# Altium PCB HU_revC.PcbDoc (part 5 of 5)
Units mm, origin at the board's own origin, x right, y up, seen from the top; angles counter-clockwise.
Board outline 391 x 236 mm, 6 copper layers (Top Layer, Layer 1, Layer 2, Layer 3, Layer 4, Bottom Layer), stack 1.538 mm thick; 737 components, 574 nets, 2599 pads, 143 vias.
Unrouted connection lines stored in the file: 1682.
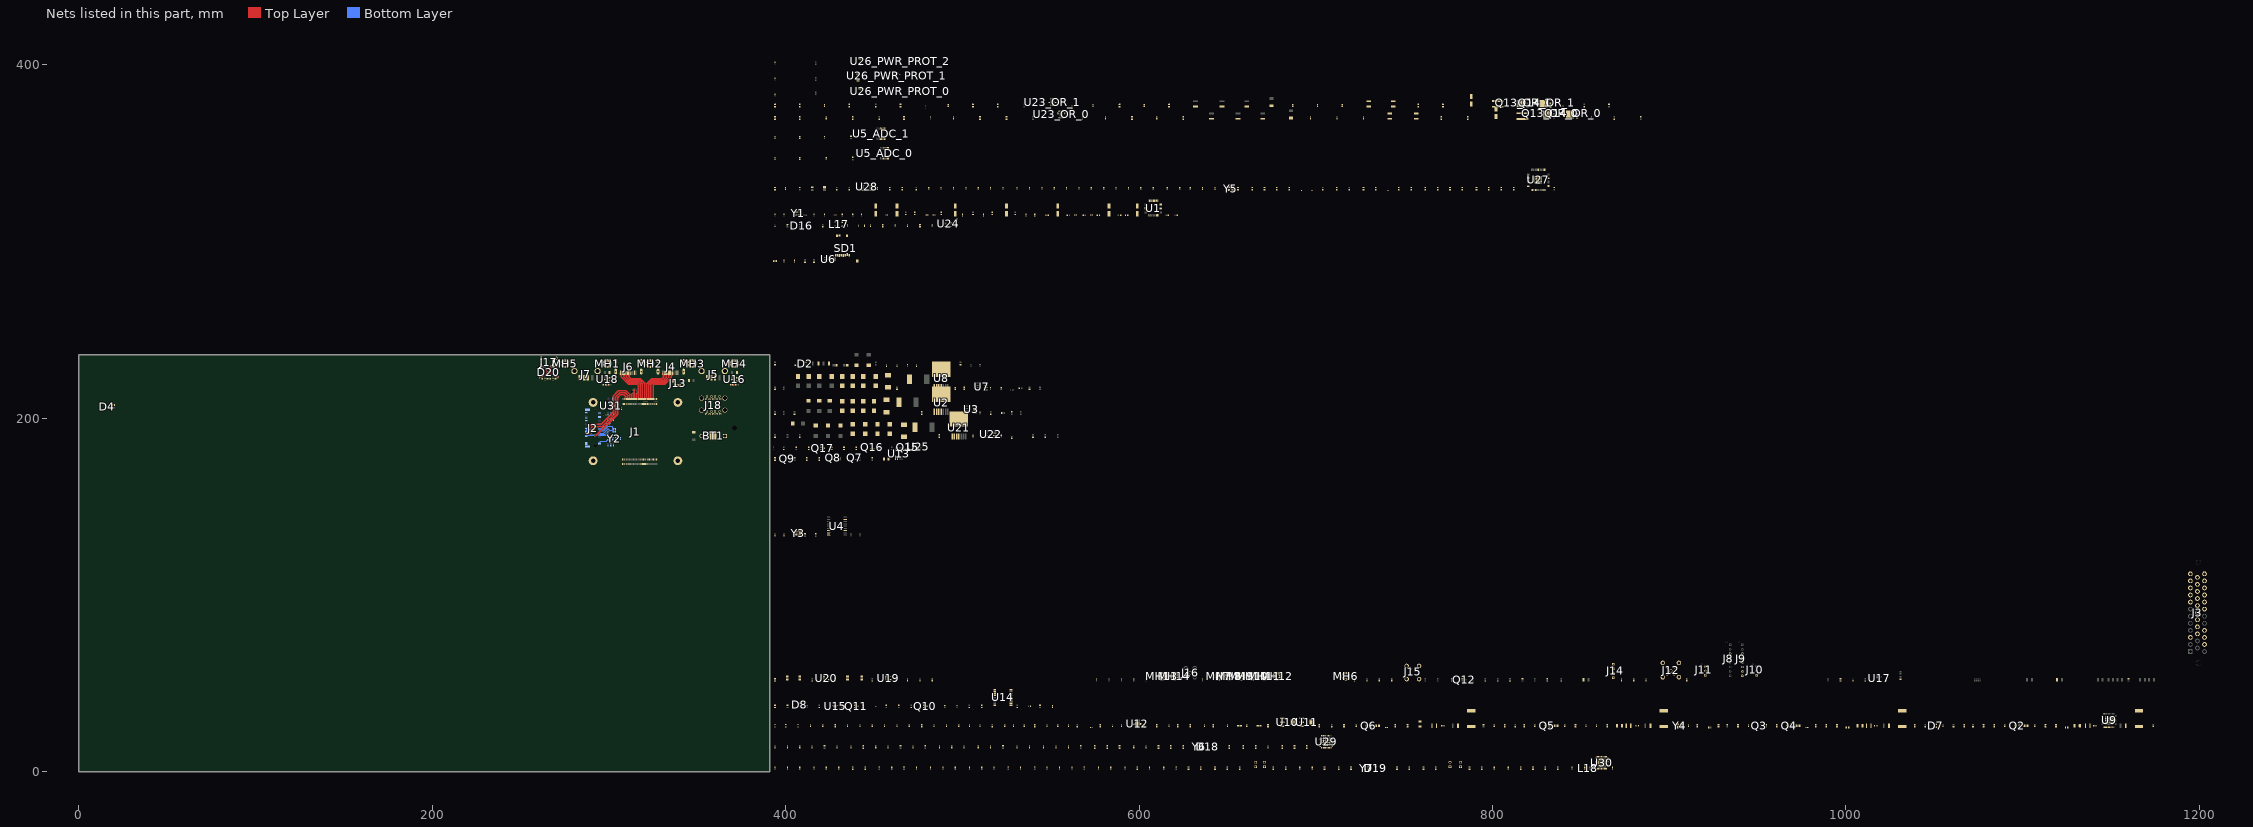
[diagram p4: the nets of this part, all layers, seen from the top]

## Via types
v1: diameter 0.5, hole 0.3, Top Layer to Bottom Layer, 143 vias

## Nets (pads, with @x,y where several pads share a name; then routed paths per layer and width w, separated by ;. In a path a pad name is that pad's centre, name@x,y a point inside that pad or via, vN(x,y) a via of type N, cw(c..) or ccw(c..) an arc to the next point about the centre after c; other vN are vias at no path point) (continued)
GND: BT1.3 C8.2 C9.2 C10.2 C11.2 C12.2 C13.2 C14.2 C15.2 C16.2 C17.2 C18.2 C19.1 C20.1 C21.2 C22.2 C23.2 C24.2 C25.2 C27.2 C28.2 C29.2 C30.2 C31.2 C32.2 C33.2 C36.2 C37.2 C38.2 C39.2 C40.2 C41.2 C42.2 C43.2 C44.2 C45.2 C46.2 C47.2 C48.2 C49.2 C50_ADC_0.2 C50_ADC_1.2 C51_ADC_0.2 C51_ADC_1.2 C52_ADC_0.2 C52_ADC_1.2 C53.2 C54.2 C55.2 C57.2 C58.2 C59.2 C60.2 C61.2 C62.2 C63.2 C64.2 C66.2 C68.1 C70.2 C72.1 C74.1 C75.1 C76.2 C78.1 C80.2 C82.1 C83.1 C84.2 C85.1 C86.2 C90.1 C91.1 C92.1 C93.1 C94.1 C95.1 C96.1 C97.1 C98.1 C99.1 C101.1 C102.1 C103.1 C104.1 C105.1 C106.1 C107.1 C108.1 C109.1 C110.1 C111.2 C112.2 C113.2 C114.2 C115.2 C116.2 C117.2 C118.2 C119.2 C120.2 C121.2 C122.2 C123.2 C124.2 C125.2 C126.2 C127.2 C128.2 C129.2 C130.2 C131.2 C132.2 C133.2 C134.2 C135.2 C136.2 C137.2 C138.2 C140.2 C141.2 C142.2 C143.2 C144.2 C145.2 C146.2 C147_OR_0.1 C147_OR_1.1 C148_OR_0.2 C148_OR_1.2 C149_OR_0.2 C149_OR_1.2 C152_OR_0.2 C152_OR_1.2 C153_OR_0.1 C153_OR_1.1 C154_OR_0.1 C154_OR_1.1 C155_OR_0.1 C155_OR_1.1 C156_OR_0.1 C156_OR_1.1 C158_OR_0.2 C158_OR_1.2 C159_OR_0.1 C159_OR_1.1 C160.2 C161.2 C162.2 C163.2 C164.2 C165.1 C166.1 C167.2 C168_PWR_PROT_0.2 C168_PWR_PROT_1.2 C168_PWR_PROT_2.2 C169.2 C170.2 C171.2 C172.2 C173.2 C174.2 C175.2 C176.2 C177.2 C178.2 C179.2 C180.2 C181.2 C182.2 C183.2 C184.2 C185.2 C186.2 C187.2 C188.2 C189.2 C190.2 C191.2 C192.2 C193.2 C194.2 C195.2 C196.2 C197.2 C198.2 C199.2 C200.2 C201.2 C202.2 C203.2 C204.2 C205.2 C206.2 C207.2 C208.2 C209.2 C210.2 C211.2 C212.2 C213.2 C214.2 C215.2 C216.2 C217.2 C218.2 C222.2 C223.2 C224.2 C225.2 C226.2 C227.2 C228.2 C229.2 C230.2 C231.2 C232.2 C233.2 C234.2 C235.2 C236.2 C237.2 C238.2 C239.2 C240.2 C241.2 C242.2 C243.2 C244.2 C245.2 C246.2 C247.2 C248.2 D3.2 D5.2 D6.2 D9.2 D10.2 D11_OR_0.2 D11_OR_1.2 D12_OR_0.1 D12_OR_1.1 D13_OR_0.2 D13_OR_1.2 D14_OR_0.2 D14_OR_1.2 D16.3 D17.2 D20.3 D20.8 J1.1 J1.2 J1.7 J1.8 J1.13 J1.14 J1.22 J1.23 J1.32 J1.33 J1.42 J1.43 J1.52 J1.53 J1.59 J1.60 J1.65 J1.66 J1.71 J1.74 J1.98 J1.107 J1.108 J1.113 J1.114 J1.119 J1.120 J1.125 J1.126 J1.131 J1.132 J1.137 J1.138 J1.144 J1.150 J1.155 J1.156 J1.161 J1.162 J1.167 J1.168 J1.173 J1.174 J1.179 J1.180 J1.185 J1.186 J1.191 J1.192 J1.197 J1.198 J1.201 J1.202 J1.203 J1.204 J2.1 J2.3 J2.9 J2.15 J2.21 J2.27 J2.33 J2.39 J2.45 J2.51 J2.57 J2.71 J2.73 J2.75 J2.76 J2.77 J3.3 J3.8 J3.9 J3.15 J3.16 J3.17 J3.18 J3.19 J3.20 J3.21 J3.22 J3.25 J3.26 J3.27 J3.30 J3.33 J4.2 J4.5 J4.8 J4.11 J4.17 J4.SH1 J4.SH2 J4.SH3 J4.SH4 J5.4 J5.5 J5.6 J6.2 J6.5 J6.8 J6.11 J6.17 J6.SH1 J6.SH2 J6.SH3 J6.SH4 J7.4 J7.5 J7.6 J8.3 J8.4 J9.3 J9.4 J10.2 J11.2 J13.3 J13.5 J13.6 J14.3 J17.A1_B12 J17.B1_A12 J17.SH1 J17.SH2 J17.SH3 J17.SH4 J18.4 J18.7 J18.13 J18.16 J18.19 J18.20 J18.21 J18.22 MH1.1 MH2.1 MH3.1 MH4.1 MH5.1 MH6.1 MH7.1 MH8.1 MH9.1 MH10.1 MH11.1 MH12.1 MH13.1 MH14.1 MP1.1 Q2.5 Q4.5 Q5.5 Q6.5 Q9.2 Q11.2 Q12.2 Q17.2 R4.1 R7.1 R11.1 R14.1 R18.1 R22.2 R25.1 R26.1 R27.2 R28.1 R30.1 R35.1 R36.1 R40.1 R47.2 R51.1 R61.1 R64.1 R69.1 R74.1 R75.1 R77.1 R80.1 R81.1 R86.1 R88.1 R90.1 R92.1 R96.1 R98.1 R103.1 R105.1 R106.1 R117.2 R123.1 R130.2 R133.2 R139.1 R145.1 R149.1 R151.1 R158.1 R161.2 R169.2 R170.2 R176.1 R178.1 R181.1 R186.1 R188_OR_0.1 R188_OR_1.1 R196_OR_0.1 R196_OR_1.1 R197_OR_0.1 R197_OR_1.1 R198_OR_0.1 R198_OR_1.1 R199_OR_0.1 R199_OR_1.1 R201_OR_0.1 R201_OR_1.1 R210.1 R212.1 R218.2 R227.2 R229.2 R230.2 R231.2 R232.2 R233.2 R236.1 R237.2 R241.1 R246.1 R247.1 R248.1 R249.1 R251.1 R253.1 R254.1 R259.2 R265.2 R266.2 R269.1 R270.1 R277.1 R278.1 R279.1 R283.2 R289.2 R290.2 SD1.6 SD1.10 SD1.11 SD1.12 SD1.13 SW1.1 U1.4 U1.6 U1.7 U1.13 U1.22 U1.30 U1.42 U2.4 U2.8 U3.5 U4.9 U5_ADC_0.3 U5_ADC_0.12 U5_ADC_1.3 U5_ADC_1.12 U6.2 U7.5 U8.4 U8.8 U9.57 U10.1 U11.1 U12.3 U12.17 U13.5 U14.1 U14.10 U14.12 U15.5 U15.7 U16.2 U17.3 U18.2 U19.2 U20.2 U21.4 U21.8 U22.5 U23_OR_0.13 U23_OR_1.13 U24.2 U25.5 U26_PWR_PROT_0.5 U26_PWR_PROT_1.5 U26_PWR_PROT_2.5 U27.EPAD U28.4 U29.49 U30.49 U31.2 Y1.2 Y1.4 Y2.2 Y3.2 Y3.4 Y4.2 Y4.4 Y5.2 Y5.4 Y6.2 Y6.4 Y7.2 Y7.4
  other v1: 859.801,2.8 860.901,2.8 862.001,2.8 863.101,2.8 864.201,2.8 859.801,3.9 860.901,3.9 862.001,3.9 863.101,3.9 864.201,3.9 859.801,5 860.901,5 862.001,5 863.101,5 864.201,5 859.801,6.1 860.901,6.1 862.001,6.1 863.101,6.1 864.201,6.1 859.801,7.2 860.901,7.2 862.001,7.2 863.101,7.2 864.201,7.2 703.801,14.8 704.901,14.8 706.001,14.8 707.101,14.8 708.201,14.8 703.801,15.9 704.901,15.9 706.001,15.9 707.101,15.9 708.201,15.9 703.801,17 704.901,17 706.001,17 707.101,17 708.201,17 703.801,18.1 704.901,18.1 706.001,18.1 707.101,18.1 708.201,18.1 703.801,19.2 704.901,19.2 706.001,19.2 707.101,19.2 708.201,19.2 1147.351,27.35 1148.451,27.35 1149.551,27.35 1150.651,27.35 1147.351,28.45 1148.451,28.45 1149.551,28.45 1150.651,28.45 1147.351,29.55 1148.451,29.55 1149.551,29.55 1150.651,29.55 1147.351,30.65 1148.451,30.65 1149.551,30.65 1150.651,30.65 291.25,189.75 289.25,191.25 291.25,191.25 289.25,192.75 291.25,192.75 291.25,194.25 297,202 298.25,202 316,209.5 317.25,209.5 318.5,209.5 319.75,209.5 321,209.5 322.25,209.5 323.5,209.5 324.75,209.5 326,209.5 327.25,209.5 312.725,215.25 313.475,215.25 315.125,215.25 315.875,215.25 313.425,216 315.175,216 263.75,221.5 268.25,221.5 264,226 266,226 268,226 824.501,333.5 825.501,333.5 826.501,333.5 827.501,333.5 824.501,334.5 825.501,334.5 826.501,334.5 827.501,334.5 824.501,335.5 825.501,335.5 826.501,335.5 827.501,335.5 824.501,336.5 825.501,336.5 826.501,336.5 827.501,336.5
GPS_TIMEPULSE: R136.1 U14.4
HDMI0_CK_N: J1.190 J4.12 | length 22.8
  Top Layer w0.123: J1.190@325.3,210.82 325.262,210.858 325.262,211.401 325.262,218.762 325.75,219.25 331.75,219.25 335.662,223.162 335.662,224.19 335.8,224.328 335.8,224.339 336,224.539 J4.12@336,225.69
HDMI0_CK_P: J1.188 J4.10 | length 22.8
  Top Layer w0.123: J1.188@324.9,210.82 324.938,210.858 324.938,218.896 325.616,219.573 331.616,219.573 335.338,223.296 335.338,224.19 335.2,224.328 335.2,224.339 335,224.539 J4.10@335,225.69
HDMI0_D0_N: J1.184 J4.9 | length 22.7
  Top Layer w0.123: J1.184@324.1,210.82 324.062,210.858 324.062,211.401 324.062,219.062 325.25,220.25 331.25,220.25 334.162,223.162 334.162,224.19 334.3,224.328 334.3,224.339 334.5,224.539 J4.9@334.5,225.69
HDMI0_D0_P: J1.182 J4.7 | length 22.7
  Top Layer w0.123: J1.182@323.7,210.82 323.738,210.858 323.738,219.196 325.116,220.573 331.116,220.573 333.838,223.296 333.838,224.19 333.7,224.328 333.7,224.339 333.5,224.539 J4.7@333.5,225.69
HDMI0_D1_N: J1.178 J4.6 | length 22.6
  Top Layer w0.123: J1.178@322.9,210.82 322.862,210.858 322.862,211.401 322.862,219.362 324.75,221.25 330.75,221.25 332.662,223.162 332.662,224.19 332.8,224.328 332.8,224.339 333,224.539 J4.6@333,225.69
HDMI0_D1_P: J1.176 J4.4 | length 22.6
  Top Layer w0.123: J1.176@322.5,210.82 322.538,210.858 322.538,219.496 324.616,221.573 330.616,221.573 332.338,223.296 332.338,224.19 332.2,224.328 332.2,224.339 332,224.539 J4.4@332,225.69
HDMI0_D2_N: J1.172 J4.3 | length 22.5
  Top Layer w0.123: J1.172@321.7,210.82 321.662,210.858 321.662,211.401 321.662,219.662 324.25,222.25 330.25,222.25 331.162,223.162 331.162,224.19 331.3,224.328 331.3,224.339 331.5,224.539 J4.3@331.5,225.69
HDMI0_D2_P: J1.170 J4.1 | length 22.5
  Top Layer w0.123: J1.170@321.3,210.82 321.338,210.858 321.338,219.796 324.116,222.573 330.116,222.573 330.838,223.296 330.838,224.19 330.7,224.328 330.7,224.339 330.5,224.539 J4.1@330.5,225.69
HDMI1_CK_N: J1.166 J6.12 | length 21.7
  Top Layer w0.123: J6.12@312,225.69 312,224.539 311.8,224.339 311.8,224.328 311.662,224.19 311.662,223.338 312.427,222.573 317.634,222.573 320.462,219.746 320.462,211.401 320.462,210.858 J1.166@320.5,210.82
HDMI1_CK_P: J1.164 J6.10 | length 21.7
  Top Layer w0.123: J6.10@311,225.69 311,224.539 311.2,224.339 311.2,224.328 311.338,224.19 311.338,223.204 312.293,222.25 317.5,222.25 320.138,219.612 320.138,210.858 J1.164@320.1,210.82
HDMI1_D0_N: J1.160 J6.9 | length 21.8
  Top Layer w0.123: J6.9@310.5,225.69 310.5,224.539 310.3,224.339 310.3,224.328 310.162,224.19 310.162,223.338 311.927,221.573 317.134,221.573 319.262,219.446 319.262,211.401 319.262,210.858 J1.160@319.3,210.82
HDMI1_D0_P: J1.158 J6.7 | length 21.8
  Top Layer w0.123: J6.7@309.5,225.69 309.5,224.539 309.7,224.339 309.7,224.328 309.838,224.19 309.838,223.204 311.793,221.25 317,221.25 318.938,219.312 318.938,210.858 J1.158@318.9,210.82
HDMI1_D1_N: J1.154 J6.6 | length 22
  Top Layer w0.123: J6.6@309,225.69 309,224.539 308.8,224.339 308.8,224.328 308.662,224.19 308.662,223.338 311.427,220.573 316.634,220.573 318.062,219.146 318.062,211.401 318.062,210.858 J1.154@318.1,210.82
HDMI1_D1_P: J1.152 J6.4 | length 22
  Top Layer w0.123: J6.4@308,225.69 308,224.539 308.2,224.339 308.2,224.328 308.338,224.19 308.338,223.204 311.293,220.25 316.5,220.25 317.738,219.012 317.738,210.858 J1.152@317.7,210.82
HDMI1_D2_N: J1.148 J6.3 | length 22.1
  Top Layer w0.123: J6.3@307.5,225.69 307.5,224.539 307.3,224.339 307.3,224.328 307.162,224.19 307.162,223.338 310.927,219.573 316.134,219.573 316.862,218.846 316.862,213.102 316.862,210.858 J1.148@316.9,210.82
HDMI1_D2_P: J1.146 J6.1 | length 22.1
  Top Layer w0.123: J6.1@306.5,225.69 306.5,224.539 306.7,224.339 306.7,224.328 306.838,224.19 306.838,223.204 310.793,219.25 316,219.25 316.538,218.712 316.538,212.968 316.538,211.401 316.538,210.858 J1.146@316.5,210.82
HV_CPU_FAN_PWM: J1.19 R152.2 R154.2
HV_PWR_EN: R209.1 U23_OR_0.7 U23_OR_1.7 U24.7
INT_VCC: F6.1 F18_PWR_PROT_0.1 F18_PWR_PROT_1.1 F18_PWR_PROT_2.1 R211.2 U25.3 U25.4
LAN8830_ALLPHYAD: R243.2 U29.13
LAN8830_CLK125_EN: R254.2 U29.34 U30.24
LAN8830_MODE0: R246.2 U29.33 U30.25
LAN8830_MODE1: R247.2 U29.32 U30.26
LAN8830_MODE2: R248.2 U29.30 U30.27
LAN8830_MODE3: R249.2 U29.29 U30.28
LAN8830_MODE4: R245.2 U29.36 U30.23
LAN8830_PHYAD0: R251.2 R252.2 U29.18
LAN8830_PHYAD1: R244.2 R250.2 U29.16
LAN8830_PHYAD2: R253.2 U29.15
LAN8830_RESET_N: C197.1 R242.2 U29.43
LAN8830_X25_N: C199.1 U29.45 Y6.3
LAN8830_X25_P: C198.1 U29.46 Y6.1
LAN8870_LINK_LED: R273.2 U30.38
LAN8870_MODE_STRP: J20.1 R276.1 U30.18
LAN8870_RESET_N: C222.1 R263.2 R275.2 U30.39
LAN8870_RXCTL: R268.2 U29.26 U30.17
LAN8870_RXD0: J22.1 R274.1 U29.19 U30.11
LAN8870_RXD1: J21.1 R272.1 U29.20 U30.12
LAN8870_RXD2: R271.1 U29.21 U30.14
LAN8870_RXD3: R277.2 U29.22 U30.15
LAN8870_SPEED_SEL: J19.1 R267.1 U30.32
LAN8870_VBAT: C242.1 C243.1 R280.1 R287.2 U30.1
LAN8870_VDDA: C237.1 C238.1 C239.1 C240.1 C241.1 R281.1 R286.2 U30.37 U30.41 U30.45 U30.48
LAN8870_VDDIO: C244.1 C245.1 C246.1 C247.1 R263.1 R267.2 R268.1 R271.2 R272.2 R274.2 R276.2 R288.2 U30.13 U30.20 U30.36
LAN8870_X25_N: C224.1 U30.7 Y7.3
LAN8870_X25_P: C223.1 U30.6 Y7.1
LL_FR_L: C1.1 J10.1 R4.2
LL_FR_R: C2.1 J10.3 R7.2
LL_RR_L: C3.1 J11.1 R11.2
LL_RR_R: C4.1 J11.3 R14.2
LM74910H_ISCP_OR_0: C157_OR_0.1 R190_OR_0.1 U23_OR_0.18
LM74910H_ISCP_OR_1: C157_OR_1.1 R190_OR_1.1 U23_OR_1.18
LM74910H_VS_OR_0: C151_OR_0.1 C152_OR_0.1 Q13_OR_0.5-6-7-8 R187_OR_0.2 R189_OR_0.1 R190_OR_0.2 R191_OR_0.2 R193_OR_0.2 U23_OR_0.22 U23_OR_0.24
LM74910H_VS_OR_1: C151_OR_1.1 C152_OR_1.1 Q13_OR_1.5-6-7-8 R187_OR_1.2 R189_OR_1.1 R190_OR_1.2 R191_OR_1.2 R193_OR_1.2 U23_OR_1.22 U23_OR_1.24
LNA_EN: R132.1 U14.13
M2_3V3: C36.1 C37.1 C38.1 C39.1 C40.1 C41.1 C42.1 C43.1 C44.1 C45.1 D4.2 D4.3 J2.2 J2.4 J2.12 J2.14 J2.16 J2.18 J2.70 J2.72 J2.74 R45.1 R46.1 U31.1 Y2.1 Y2.4
MATENET_GND: C124.1 C125.1 C126.1 C127.1 C221.1 J15.3 R264.2
MAX96724_1V2: C86.1 C98.2 C99.2 C101.2 C102.2 C109.2 C110.2 C111.1 R106.2 U9.30 U9.55 U9.56 U11.2 U11.4
MAX96724_1V8: C84.1 C103.2 C104.2 C105.2 C106.2 C112.1 U9.7 U9.21 U10.2 U10.4
MAX96724_3V3: C83.2 C85.2 C107.2 C108.2 C113.1 F12.1 R71.2 R83.2 R99.2 U9.24 U10.3 U11.3
MAX96724_CFG0: R71.1 R74.2 U9.4
MAX96724_CFG1: R83.1 R88.2 U9.25
MAX96724_PoC_A: C65.2 J12.2 L5.2
MAX96724_PoC_A_V_N: L3.1 R70.1 R108.1
MAX96724_PoC_A_V_P: C68.2 Q2.4 R70.2 R107.1
MAX96724_PoC_B: C69.2 J12.1 L8.2
MAX96724_PoC_B_V_N: L6.1 R82.1 R110.1
MAX96724_PoC_B_V_P: C72.2 Q4.4 R82.2 R109.1
MAX96724_PoC_C: C73.2 J12.4 L11.2
MAX96724_PoC_C_V_N: L9.1 R93.1 R112.1
MAX96724_PoC_C_V_P: C78.2 Q5.4 R93.2 R111.1
MAX96724_PoC_D: C79.2 J12.3 L14.2
MAX96724_PoC_D_V_N: L12.1 R100.1 R116.1
MAX96724_PoC_D_V_P: C82.2 Q6.4 R100.2 R114.1
MAX96724_SIOA_N: C67.1 U9.22
MAX96724_SIOA_P: C65.1 U9.23
MAX96724_SIOB_N: C71.1 U9.19
MAX96724_SIOB_P: C69.1 U9.18
MAX96724_SIOC_N: C77.1 U9.9
MAX96724_SIOC_P: C73.1 U9.10
MAX96724_SIOD_N: C81.1 U9.6
MAX96724_SIOD_P: C79.1 U9.5
MAX96724_X_N: C75.2 U9.16 Y4.3
MAX96724_X_P: C74.2 U9.15 Y4.1
MCP2515_X_N: C49.1 U4.7 Y3.3
MCP2515_X_P: C48.1 U4.8 Y3.1
MIC_N: J3.32
MIC_P: C6.2 C7.2 J3.31 R20.1
MINIFAKRA_GND: C120.1 C121.1 C122.1 C123.1 J12.MH1 J12.MH2 J12.MH3 J12.MH4 J12.MH5
NetBT1_1: BT1.1 BT1.2 D1.2
NetC1_2: C1.2 U1.35
NetC2_2: C2.2 U1.36
NetC5_2: C5.2 R16.2 R17.2
NetC6_1: C6.1 U1.23
NetC7_1: C7.1 U1.24
NetC8_1: C8.1 R19.1 R20.2
NetC10_1: C10.1 U1.28
NetC26_1: C26.1 U2.3
NetC26_2: C26.2 D3.1 L1.1 U2.1
NetC27_1: C27.1 C28.1 C29.1 C30.1 U2.2 U26_PWR_PROT_1.3 U26_PWR_PROT_1.4
NetC51_ADC_0_1: C51_ADC_0.1 C52_ADC_0.1 R58_ADC_0.2 U5_ADC_0.13
NetC51_ADC_1_1: C51_ADC_1.1 C52_ADC_1.1 R58_ADC_1.2 U5_ADC_1.13
NetC53_1: C53.1 C54.1 SD1.4 U6.1
NetC56_1: C56.1 U8.3
NetC56_2: C56.2 D6.1 L2.1 U8.1
NetC57_1: C57.1 C58.1 C59.1 C60.1 R65.1 U8.2 U26_PWR_PROT_2.3 U26_PWR_PROT_2.4
NetC66_1: C66.1 L3.2 L4.1 R73.2
NetC67_2: C67.2 R75.2
NetC70_1: C70.1 L6.2 L7.1 R85.2
NetC71_2: C71.2 R90.2
NetC76_1: C76.1 L9.2 L10.1 R95.2
NetC77_2: C77.2 R96.2
NetC80_1: C80.1 L12.2 L13.1 R102.2
NetC81_2: C81.2 R103.2
NetC87_1: C87.1 R108.2 U12.12
NetC87_2: C87.2 R107.2 U12.11
NetC88_1: C88.1 R110.2 U12.14
NetC88_2: C88.2 R109.2 U12.13
NetC89_1: C89.1 R112.2 U12.7
NetC89_2: C89.2 R111.2 U12.8
NetC92_2: C92.2 C93.2 C94.2 U9.8
NetC95_2: C95.2 C96.2 C97.2 U9.20
NetC100_1: C100.1 R116.2 U12.9
NetC100_2: C100.2 R114.2 U12.10
NetC139_1: C139.1 U21.3
NetC139_2: C139.2 D10.1 L16.1 U21.1
NetC140_1: C140.1 C141.1 C142.1 C143.1 R182.1 U21.2 U26_PWR_PROT_0.3 U26_PWR_PROT_0.4
NetC150_OR_0_1: C150_OR_0.1 R191_OR_0.1 U23_OR_0.20
NetC150_OR_0_2: C150_OR_0.2 C157_OR_0.2 Q14_OR_0.5-6-7-8 R189_OR_0.2 U23_OR_0.19
NetC150_OR_1_1: C150_OR_1.1 R191_OR_1.1 U23_OR_1.20
NetC150_OR_1_2: C150_OR_1.2 C157_OR_1.2 Q14_OR_1.5-6-7-8 R189_OR_1.2 U23_OR_1.19
NetC151_OR_0_2: C151_OR_0.2 U23_OR_0.23
NetC151_OR_1_2: C151_OR_1.2 U23_OR_1.23
NetC156_OR_0_2: C156_OR_0.2 R192_OR_0.1
NetC156_OR_1_2: C156_OR_1.2 R192_OR_1.1
NetC158_OR_0_1: C158_OR_0.1 R195_OR_0.1 R196_OR_0.2 U23_OR_0.4
NetC158_OR_1_1: C158_OR_1.1 R195_OR_1.1 R196_OR_1.2 U23_OR_1.4
NetC159_OR_0_2: C159_OR_0.2 R197_OR_0.2 U23_OR_0.9
NetC159_OR_1_2: C159_OR_1.2 R197_OR_1.2 U23_OR_1.9
NetC162_1: C162.1 D15.1 R202.2 U24.10
NetC163_1: C163.1 R202.1 R203.2 SW1.2
NetC165_2: C165.2 R204.1 R205.2
NetC196_1: C196.1 U28.6
NetC206_1: C206.1 C207.1 C208.1 C209.1 C210.1 R256.2 U29.23 U29.27 U29.31 U29.40
NetC211_1: C211.1 C212.1 R257.2 U29.47
NetC213_1: C213.1 C214.1 C215.1 R258.2 U29.1 U29.12
NetC216_1: C216.1 C217.1 C218.1 R260.2 U29.4 U29.9
NetC221_2: C221.2 R261.1 R262.1 R264.1
NetC225_1: C225.1 C226.1 R281.2 U30.9
NetC227_1: C227.1 C228.1 C229.1 C230.1 R282.2 U30.10 U30.19 U30.29
NetC231_1: C231.1 C232.1 C233.1 C234.1 R284.2 U30.5 U30.44 U30.46
NetC235_1: C235.1 C236.1 R285.2 U30.22
NetD2_1: D2.1 R31.1
NetD2_4: D2.4 R32.1
NetD4_1: D4.1 R47.1
NetD4_4: D4.4 R49.1
NetD7_1: D7.1 R80.2
NetD7_2: D7.2 Q3.3
NetD7_3: D7.3 Q3.6
NetD7_4: D7.4 R81.2
NetD8_1: D8.1 R135.2
NetD8_4: D8.4 R136.2
NetD13_OR_0_1: D13_OR_0.1 R137.2 R193_OR_0.1 U23_OR_0.6
NetD13_OR_1_1: D13_OR_1.1 R193_OR_1.1 U23_OR_1.6
NetD18_1: D18.1 R250.1
NetD18_4: D18.4 R252.1
NetD19_1: D19.1 R273.1
NetD19_4: D19.4 R275.1
NetF1_2: F1.2 R48.2 U31.5 | length 2
  Bottom Layer w0.3: U31.5@301.95,208.375 302.075,208.5 R48.2@303.85,208.5
NetF2_2: F2.2 Q2.2 R72.2
NetF3_2: F3.2 Q4.2 R84.2
NetF4_2: F4.2 Q5.2 R94.2
NetF5_2: F5.2 Q6.2 R101.2
NetF6_2: F6.2 Q7.1 Q7.2 Q7.3 Q8.1 Q8.2 Q8.3 R120.2
NetF13_2: F13.2 U16.5
NetF15_2: F15.2 U18.5
NetF16_1: F16.1 J13.1
NetF17_1: F17.1 J14.1
NetF18_PWR_PROT_0_2: F18_PWR_PROT_0.2 U26_PWR_PROT_0.1 U26_PWR_PROT_0.2
NetF18_PWR_PROT_1_2: F18_PWR_PROT_1.2 U26_PWR_PROT_1.1 U26_PWR_PROT_1.2
NetF18_PWR_PROT_2_2: F18_PWR_PROT_2.2 U26_PWR_PROT_2.1 U26_PWR_PROT_2.2
NetJ1_78: J1.78 R24.1
NetJ2_68: J2.68 R44.2 | length 5.2
  Bottom Layer w0.3: J2.68@294.65,187 298.575,187 299.425,187.85 R44.2@299.5,187.85
NetJ13_2: J13.2 R152.1
NetJ13_4: J13.4 R156.1
NetJ14_2: J14.2 R153.1
NetJ14_4: J14.4 R157.1
NetJ16_1: J16.1 L15.2 R124.2
NetJ18_5: J18.5 R174.2
NetJ18_6: J18.6 R173.2
NetJ18_8: J18.8 R172.2
NetJ18_9: J18.9 R171.2
NetJ19_2: J19.2 R269.2
NetJ20_2: J20.2 R270.2
NetJ21_2: J21.2 R278.2
NetJ22_2: J22.2 R279.2
NetL4_2: L4.2 L5.1 R73.1
NetL7_2: L7.2 L8.1 R85.1
NetL10_2: L10.2 L11.1 R95.1
NetL13_2: L13.2 L14.1 R102.1
NetQ2_1: Q2.1 R76.1 R77.2
NetQ2_3: Q2.3 Q2.6 R72.1
NetQ3_2: Q3.2 R87.2 R89.2
NetQ3_5: Q3.5 R78.1 R79.1
NetQ4_1: Q4.1 R91.1 R92.2
NetQ4_3: Q4.3 Q4.6 R84.1
NetQ5_1: Q5.1 R97.1 R98.2
NetQ5_3: Q5.3 Q5.6 R94.1
NetQ6_1: Q6.1 R104.1 R105.2
NetQ6_3: Q6.3 Q6.6 R101.1
NetQ7_5-6-7-8: Q7.5-6-7-8 Q8.5-6-7-8 U13.1 U13.2
NetQ9_1: Q9.1 R122.2 R123.2
NetQ9_3: Q9.3 R121.1
NetQ10_1: Q10.1 R126.1 R127.1
NetQ10_3: Q10.3 R128.1 R129.1
NetQ11_1: Q11.1 R132.2 R133.1
NetQ12_1: Q12.1 R159.2 R161.1
NetQ13_OR_0_4: Q13_OR_0.4 U23_OR_0.1
NetQ13_OR_1_4: Q13_OR_1.4 U23_OR_1.1
NetQ14_OR_0_4: Q14_OR_0.4 R192_OR_0.2 U23_OR_0.14
NetQ14_OR_1_4: Q14_OR_1.4 R192_OR_1.2 U23_OR_1.14
NetQ15_5-6-7-8: Q15.5-6-7-8 Q16.5-6-7-8 U25.1 U25.2
NetQ17_1: Q17.1 R209.2 R210.2
NetQ17_3: Q17.3 R208.1
NetR5_1: R5.1 U1.43
NetR6_1: R6.1 U1.38
NetR8_1: R8.1 U1.39
NetR9_1: R9.1 U1.44
NetR10_1: R10.1 U1.33
NetR12_1: R12.1 U1.46
NetR13_1: R13.1 U1.34
NetR15_1: R15.1 U1.47
NetR16_1: R16.1 U1.40
NetR17_1: R17.1 U1.41
NetR34_2: R34.2
NetR37_1: R37.1
NetR37_2: R37.2 U3.7
NetR38_1: R38.1 U3.6
NetR48_1: R48.1 R50.1 R51.2 U31.4 | length 8.6
  Bottom Layer w0.3: U31.4@300.05,208.375 300.05,208.15 301.2,207 R51.2@303.85,207 303.85,207.075 304.9,208.125 304.9,208.25 R48.1@305.15,208.5 305.15,208.575 304.1,209.625 304.1,209.75 R50.1@303.85,210
NetR56_2: R56.2 R148.1 U4.17
NetR57_2: R57.2 R146.1 U4.12
NetR59_1: R59.1 R60.1 R61.2 U6.4
NetR63_1: R63.1 R65.2
NetR66_1: R66.1
NetR66_2: R66.2 U7.7
NetR67_1: R67.1 U7.6
NetR86_2: R86.2 U9.17
NetR113_1: R113.1 U12.16
NetR115_1: R115.1 U12.1
NetR117_1: R117.1 U12.6
NetR118_2: R118.2 U13.7
NetR125_2: R125.2 U14.9
NetR131_2: R131.2 TP4.1 U14.18
NetR134_1: R134.1 U15.4
NetR138_1: R138.1 R139.2 U16.4 | length 4.1
  Top Layer w0.3: R139.2@370.15,219 R138.1@371.85,219 371.85,220.75 372.15,221.05 U16.4@372.375,221.05
NetR147_1: R147.1 R149.2 U17.1
NetR150_1: R150.1 R151.2 U18.4 | length 4.1
  Top Layer w0.3: R151.2@298.15,219 R150.1@299.85,219 299.85,220.75 300.15,221.05 U18.4@300.375,221.05
NetR163_2: R163.2 U14.2
NetR164_2: R164.2 U14.3
NetR175_1: R175.1 R176.2 U19.4
NetR177_1: R177.1 R178.2 U20.4
NetR180_1: R180.1 R182.2
NetR183_1: R183.1
NetR183_2: R183.2 U22.7
NetR184_1: R184.1 U22.6
NetR195_OR_0_2: R195_OR_0.2 R200_OR_0.2 U23_OR_0.3
NetR195_OR_1_2: R195_OR_1.2 R200_OR_1.2 U23_OR_1.3
NetR199_OR_0_2: R199_OR_0.2 U23_OR_0.11
NetR199_OR_1_2: R199_OR_1.2 U23_OR_1.11
NetR200_OR_0_1: R200_OR_0.1 R201_OR_0.2 U23_OR_0.5
NetR200_OR_1_1: R200_OR_1.1 R201_OR_1.2 U23_OR_1.5
NetR203_1: R203.1 U24.9
NetR214_2: R214.2 R218.1 U27.16
NetR215_2: R215.2 U27.33
NetR216_2: R216.2 U27.34
NetR217_2: R217.2 U27.21
NetR219_2: R219.2 U27.22
NetR220_2: R220.2 U27.41
NetR221_2: R221.2 U27.42
NetR222_2: R222.2 U27.49
NetR223_2: R223.2 U27.50
NetR224_2: R224.2 U27.56
NetR225_2: R225.2 U27.57
NetR226_1: R226.1 U27.8
NetR227_1: R227.1 U27.9
NetR228_1: R228.1 U27.10
NetR229_1: R229.1 U27.13
NetR230_1: R230.1 U27.64
NetR231_1: R231.1 U27.1
NetR232_1: R232.1 U27.3
NetR233_1: R233.1 U27.4
NetR235_1: R235.1 R236.2 U27.7
NetR237_1: R237.1 U27.32
NetR239_1: R239.1 R241.2 U28.7
NetR240_2: R240.2 U28.3
NetR259_1: R259.1 U29.48
NetR265_1: R265.1 U30.4
NetR266_1: R266.1 U30.8
NetR280_2: R280.2 R283.1 U30.3
NetR289_1: R289.1 U30.47
NetR290_1: R290.1 U30.21
NetSD1_9: SD1.9
NetTP5_1: TP5.1 U27.17
NetTP6_1: TP6.1 U27.5
NetTP7_1: TP7.1 U27.6
NetU5_ADC_0_4: U5_ADC_0.4
NetU5_ADC_0_5: U5_ADC_0.5
NetU5_ADC_0_6: U5_ADC_0.6
NetU5_ADC_0_7: U5_ADC_0.7
NetU5_ADC_0_8: U5_ADC_0.8
NetU5_ADC_0_9: U5_ADC_0.9
NetU5_ADC_0_10: U5_ADC_0.10
NetU5_ADC_0_11: U5_ADC_0.11
NetU5_ADC_1_4: U5_ADC_1.4
NetU5_ADC_1_5: U5_ADC_1.5
NetU5_ADC_1_6: U5_ADC_1.6
NetU5_ADC_1_7: U5_ADC_1.7
NetU5_ADC_1_8: U5_ADC_1.8
NetU5_ADC_1_9: U5_ADC_1.9
NetU5_ADC_1_10: U5_ADC_1.10
NetU5_ADC_1_11: U5_ADC_1.11
NetU29_25: U29.25 U30.16
nPCIE_CLKREQ: J2.52 R42.1 | length 5.5
  Bottom Layer w0.3: J2.52@294.65,191 298,191 R42.1@299.5,192.5
nPCIE_RST: J2.50 R41.1 R46.2 | length 9.4
  Bottom Layer w0.3: J2.50@294.65,191.5 297,191.5 R41.1@299.5,194 300.25,193.25 301.675,193.25 302.35,192.575 R46.2@302.35,192.5
nPCIE_WAKE: J2.54 R43.1 | length 5.1
  Bottom Layer w0.3: J2.54@294.65,190.5 299,190.5 R43.1@299.5,191
PCIE_CLK_N: J1.112 J2.53 | length 39.8
  Top Layer w0.178: v1(292,190.875) 292.079,190.875 292.265,190.689 292.939,190.689 304.75,202.5 304.75,211.785 306.372,213.407 306.593,213.628 308.407,213.628 309.689,212.346 309.689,210.831 J1.112@309.7,210.82
  Bottom Layer w0.178: J2.53@287.1,190.75 287.161,190.689 289.582,190.689 291.735,190.689 291.921,190.875 v1(292,190.875)
PCIE_CLK_P: J1.110 J2.55 | length 39.1
  Top Layer w0.178: v1(292,190.125) 292.079,190.125 292.265,190.311 293.096,190.311 305.128,202.343 305.128,204.628 305.128,211.628 306.75,213.25 308.25,213.25 309.311,212.189 309.311,210.831 J1.110@309.3,210.82
  Bottom Layer w0.178: J2.55@287.1,190.25 287.161,190.311 289.739,190.311 291.735,190.311 291.921,190.125 v1(292,190.125)
PCIE_RX0_N: J1.118 J2.43 | length 46.1
  Top Layer w0.178: v1(292,193.125) 291.921,193.125 291.735,193.311 290.404,193.311 289.872,193.843 289.872,194.907 290.593,195.628 296.128,195.628 303.5,203 303.5,212.285 306.093,214.878 308.907,214.878 309.128,214.657 310.668,213.117 310.889,212.896 310.889,210.831 J1.118@310.9,210.82
  Bottom Layer w0.178: J2.43@287.1,193.25 287.161,193.311 291.735,193.311 291.921,193.125 v1(292,193.125)
PCIE_RX0_P: J1.116 J2.41 | length 44.2
  Top Layer w0.178: v1(292,193.875) 291.921,193.875 291.735,193.689 290.561,193.689 290.25,194 290.25,194.75 290.75,195.25 296.285,195.25 303.878,202.843 303.878,212.128 306.25,214.5 308.75,214.5 310.511,212.739 310.511,211.323 310.511,210.831 J1.116@310.5,210.82
  Bottom Layer w0.178: J2.41@287.1,193.75 287.161,193.689 291.735,193.689 291.921,193.875 v1(292,193.875)
PCIE_TX0_N: J1.124 J2.49 | length 49.8
  Top Layer w0.178: v1(290,191.625) 289.921,191.625 289.735,191.811 288.404,191.811 288.233,191.983 287.872,192.343 287.872,194.657 288.093,194.878 289.994,196.779 290.215,197 295.75,197 302.372,203.622 302.372,212.907 305.343,215.878 309.569,215.878 312.089,213.358 312.089,210.831 J1.124@312.1,210.82
  Bottom Layer w0.178: J2.49@287.1,191.75 287.161,191.811 288.739,191.811 289.735,191.811 289.921,191.625 v1(290,191.625)
PCIE_TX0_P: J1.122 J2.47 | length 47.9
  Top Layer w0.178: v1(290,192.375) 289.921,192.375 289.735,192.189 288.561,192.189 288.25,192.5 288.25,194.5 290.372,196.622 295.907,196.622 302.75,203.465 302.75,212.75 305.5,215.5 309.412,215.5 311.711,213.201 311.711,211.323 311.711,210.831 J1.122@311.7,210.82
  Bottom Layer w0.178: J2.47@287.1,192.25 287.161,192.189 288.582,192.189 289.735,192.189 289.921,192.375 v1(290,192.375)
PRE_CAN_N: L17.3 U24.12
PRE_CAN_P: L17.2 U24.13
PRE_RC_DBG_USB_N: J1.103 R166.2
PRE_RC_DBG_USB_P: J1.105 R165.2
PRE_VCC: C147_OR_0.2 C147_OR_1.2 C148_OR_0.1 C148_OR_1.1 C149_OR_0.1 C149_OR_1.1 D15.2 Q14_OR_0.1-2-3 Q14_OR_1.1-2-3 Q15.1 Q15.2 Q15.3 Q16.1 Q16.2 Q16.3 R207.2 U23_OR_0.15 U23_OR_0.16 U23_OR_1.15 U23_OR_1.16
PWR_IN_SW_GATE: Q15.4 Q16.4 R207.1 R208.2
PWR_SW_GATE: Q7.4 Q8.4 R120.1 R121.2
RF_IN: R124.1 U14.11
RL_N: J3.23 J9.8
RL_P: J3.12 J9.7
RPI_1V8: J1.88 J1.90
RR_N: J3.11 J9.6
RR_P: J3.10 J9.5
RSOL: C3.2 R6.2 R10.2
RSOR: C4.2 R8.2 R13.2
SD_CLK: J1.57 SD1.5
SD_CMD: J1.62 SD1.3
SD_DAT0: J1.63 SD1.7
SD_DAT1: J1.67 SD1.8
SD_DAT2: J1.69 SD1.1
SD_DAT3: J1.61 SD1.2
SMB_CLK: J2.40 TP1.1 | length 5.6
  Bottom Layer w0.3: J2.40@294.65,194 296,194 TP1.1@299,197
SMB_DATA: J2.42 TP2.1 | length 7.3
  Bottom Layer w0.3: J2.42@294.65,193.5 296.5,193.5 300,197 TP2.1@300.5,197
SMB_nALERT: J2.44 R45.2 TP3.1 | length 9.7
  Bottom Layer w0.3: J2.44@294.65,193 297,193 299.5,195.5 TP3.1@300.5,195.5 301.5,195.5 302.251,194.749 302.251,194.099 R45.2@302.35,194
SUB_N: J3.35
SUB_P: C5.1 J3.34 R18.2
SUSCLK_32: R44.1 Y2.3 | length 2.7
  Bottom Layer w0.3: R44.1@299.5,189.15 302.15,189.15 Y2.3@302.188,189.112
TRX_CON_N: C220.2 J15.2 R261.2
TRX_CON_P: C219.2 J15.1 R262.2
TRX_N: L18.2 U30.42
TRX_P: L18.1 U30.43
TRX_TERM_N: C220.1 L18.3
TRX_TERM_P: C219.1 L18.4
TUSB4041_USB2_DN0_N: J18.2 R216.1
TUSB4041_USB2_DN0_P: J18.3 R215.1
TUSB4041_USB2_DN1_N: R3.2 R221.1
TUSB4041_USB2_DN1_P: R1.2 R2.2 R220.1
TUSB4041_USB2_DN2_N: J5.2 R223.1
TUSB4041_USB2_DN2_P: J5.3 R222.1
TUSB4041_USB2_DN3_N: J7.2 R225.1
TUSB4041_USB2_DN3_P: J7.3 R224.1
TUSB4041_USB2_UP_N: J1.136 R219.1 | length 5.8
  Top Layer w0.158: J1.136@314.5,210.82 314.479,210.841 314.479,216.236 314.675,216.433 v1(314.675,216.5)
TUSB4041_USB2_UP_P: J1.134 R217.1 | length 5.8
  Top Layer w0.158: v1(313.925,216.5) 313.925,216.433 314.121,216.236 314.121,211.354 314.121,210.841 J1.134@314.1,210.82
TUSB4041_X24_N: C170.1 R234.1 U27.29 Y5.3
TUSB4041_X24_P: C169.1 R234.2 U27.30 Y5.1
USB2_CC1: D20.1 D20.10 J17.A5 R167.2 R169.1 | length 9
  Top Layer w0.3: J17.A5@267.25,229.25 267.25,227 267,226.75 D20.1@267,226.417 D20.10@267,225.583 267,225.25 267.25,225 268.325,225 R169.1@269.675,223.65 ; R169.1@269.75,223.65 269.825,223.575 271.175,223.575 R167.2@271.25,223.5
USB2_CC2: D20.5 D20.6 J17.B5 R168.2 R170.1 | length 9.2
  Top Layer w0.3: R168.2@260.75,223.5 260.825,223.575 262.175,223.575 R170.1@262.25,223.65 ; R170.1@262.325,223.65 263.675,225 264.75,225 265,225.25 D20.6@265,225.583 D20.5@265,226.417 265,226.75 264.25,227.5 J17.B5@264.25,229.25
USB3_0_RX_N: J1.128 R174.1 | length 3.8
  Top Layer w0.158: v1(312.725,214.5) 312.725,214.433 312.921,214.236 312.921,212.629 312.921,210.841 J1.128@312.9,210.82
USB3_0_RX_P: J1.130 R173.1 | length 3.8
  Top Layer w0.158: J1.130@313.3,210.82 313.279,210.841 313.279,211.354 313.279,212.481 313.279,214.236 313.475,214.433 v1(313.475,214.5)
USB3_0_TX_N: J1.140 R172.1 | length 3.8
  Top Layer w0.158: v1(315.125,214.5) 315.125,214.433 315.321,214.236 315.321,212.629 315.321,210.841 J1.140@315.3,210.82
USB3_0_TX_P: J1.142 R171.1 | length 3.8
  Top Layer w0.158: J1.142@315.7,210.82 315.679,210.841 315.679,211.354 315.679,212.481 315.679,214.236 315.875,214.433 v1(315.875,214.5)
USB3_1_D_N: J1.165 J18.11
USB3_1_D_P: J1.163 J18.12
USB3_1_RX_N: J1.157 J18.14
USB3_1_RX_P: J1.159 J18.15
USB3_1_TX_N: J1.169 J18.17
USB3_1_TX_P: J1.171 J18.18
USB_1V1_nPG: C193.1 R238.1 U27.18 U28.5
USBA0_5V: C134.1 C135.1 J18.1 U19.1
USBA1_5V: C136.1 C137.1 J18.10 U20.1
VCC_RF: Q10.2 R127.2 U14.14
VDDIO_8830: C200.1 C201.1 C202.1 C203.1 C204.1 C205.1 R242.1 R243.1 R244.1 R245.1 R255.2 U29.17 U29.24 U29.28 U29.35 U29.41
pads on no net: J1.64 J1.68 J1.70 J1.72 J1.73 J2. J2.5 J2.6 J2.7 J2.8 J2.11 J2.13 J2.17 J2.19 J2.20 J2.22 J2.23 J2.24 J2.25 J2.26 J2.28 J2.29 J2.30 J2.31 J2.32 J2.34 J2.35 J2.36 J2.37 J2.38 J2.46 J2.48 J2.56 J2.58 J2.67 J2.69 J3. J4.14 J6.14 J8. J9. J10. J11. J14. J17. J17.A4_B9 J17.A8 J17.B4_A9 J17.B6 J17.B7 J17.B8 R138.2 R150.2 U1.1 U1.5 U1.8 U1.9 U1.10 U1.11 U1.12 U1.14 U1.15 U1.16 U1.17 U1.25 U1.26 U1.31 U1.32 U1.45 U1.48 U2.5 U4.3 U4.4 U4.5 U4.6 U4.10 U4.11 U6.3 U8.5 U9.1 U9.2 U9.3 U9.12 U9.26 U9.27 U9.33 U9.34 U9.51 U9.52 U14.5 U14.6 U14.15 U15.1 U16.3 U18.3 U19.3 U20.3 U21.5 U23_OR_0.8 U23_OR_0.17 U23_OR_0.21 U23_OR_0.25 U23_OR_1.8 U23_OR_1.17 U23_OR_1.21 U23_OR_1.25 U25.7 U25.8 U25.9 U25.10 U26_PWR_PROT_0.7 U26_PWR_PROT_0.8 U26_PWR_PROT_0.9 U26_PWR_PROT_0.10 U26_PWR_PROT_1.7 U26_PWR_PROT_1.8 U26_PWR_PROT_1.9 U26_PWR_PROT_1.10 U26_PWR_PROT_2.7 U26_PWR_PROT_2.8 U26_PWR_PROT_2.9 U26_PWR_PROT_2.10 U27.11 U27.12 U27.14 U27.15 U27.23 U27.24 U27.26 U27.27 U27.28 U27.35 U27.36 U27.38 U27.39 U27.40 U27.43 U27.44 U27.46 U27.47 U27.51 U27.52 U27.54 U27.55 U27.58 U27.59 U27.61 U27.62 U29.14 U29.37 U29.38 U29.39 U29.42 U29.44 U30.2 U30.30 U30.31 U30.33 U30.34 U30.35 U30.40 U31.3
copper on no net:
  other v1: 297.5,225.5 297.5,226.5 555.451,371.45 556.551,371.45 555.451,372.55 556.551,372.55 550.451,378.45 551.551,378.45 550.451,379.55 551.551,379.55

## Polygon pours and split planes (outlines as drawn)
no net on Top Layer "NONET_L01_P003" (solid, remove dead copper, pour order 3): 299.75,222.5 299.75,227 301.5,227 301.5,222.5
DISP1_5V on Top Layer "DISP1_5V_L01_P002" (solid, remove dead copper, pour order 2): 289.75,224.75 289.75,221.25 296.5,221.25 296.5,222.5 298.25,222.5 298.25,224.75
NetF13_2 on Top Layer "NETF13_2_L01_P001" (solid, remove dead copper, pour order 1): 371.75,222.5 371.75,227 373.5,227 373.5,222.5
DISP0_5V on Top Layer "DISP0_5V_L01_P000" (solid, remove dead copper, pour order 0): 361.75,224.75 361.75,221.25 368.5,221.25 368.5,222.5 370.25,222.5 370.25,224.75
NetF1_2 on Bottom Layer "NETF1_2_L06_P006" (solid, remove dead copper, pour order 6): 301,207.5 301,212 303.25,212 303.25,207.5
M2_3V3 on Bottom Layer "M2_3V3_L06_P004" (solid, remove dead copper, pour order 4): 305.25,188.5 307,188.5 307,187.5 305.25,187.5 305.25,185 293.75,185 293.75,186.75 303.25,186.75 303.25,199.25 293.75,199.25 293.75,201.25 303.25,201.25 303.25,202.5 295.5,202.5 295.5,202.75 293.75,202.75 293.75,203.75 301.5,203.75 301.5,206.25 305.25,206.25

## Silkscreen, mask and mechanical layers (free items; w line width, h text height)
Top Overlay:
  text "DIG_1" at 275.11,234.392 h1
  text "HDMI_1" at 297.11,234.392 h1
  text "HDMI_0" at 320.777,234.392 h1
  text "DIG_0" at 346.776,234.392 h1
Bottom Overlay:
  text "C" at 297.996,196.238 h1.52
  text "D" at 302.52,196.238 h1.52
  text "A" at 297.996,193.988 h1.52
Mechanical 1:
  lines w0.15: 217,236 371,236 cw(c371,231) 376,231 376,153

## Text inside footprints (layer, text, board x,y; h text height)
C1: Top Overlay "+" at 599.515,321.986 h1.2 r90
C2: Top Overlay "+" at 583.515,321.986 h1.2 r90
C3: Top Overlay "+" at 554.515,321.986 h1.2 r90
C4: Top Overlay "+" at 525.515,321.986 h1.2 r90
C5: Top Overlay "+" at 496.515,321.986 h1.2 r90
C8: Top Overlay "+" at 463.515,321.986 h1.2 r90
C10: Top Overlay "+" at 451.515,321.986 h1.2 r90
J4: Mechanical 13 "PCB EDGE" at 326.5,235.725 h0.8 r180
J6: Mechanical 13 "PCB EDGE" at 302.5,235.725 h0.8 r180
U24: Top Overlay "*" at 489.886,311.679 h1.27; Mechanical 13 "*" at 491.01,310.801 h1.27
U27: Top Overlay "*" at 818.597,338.746 h1.27; Mechanical 13 "*" at 820.959,338.365 h1.27